# Allegro board CHOPPINGWAVEGENERATOR.brd
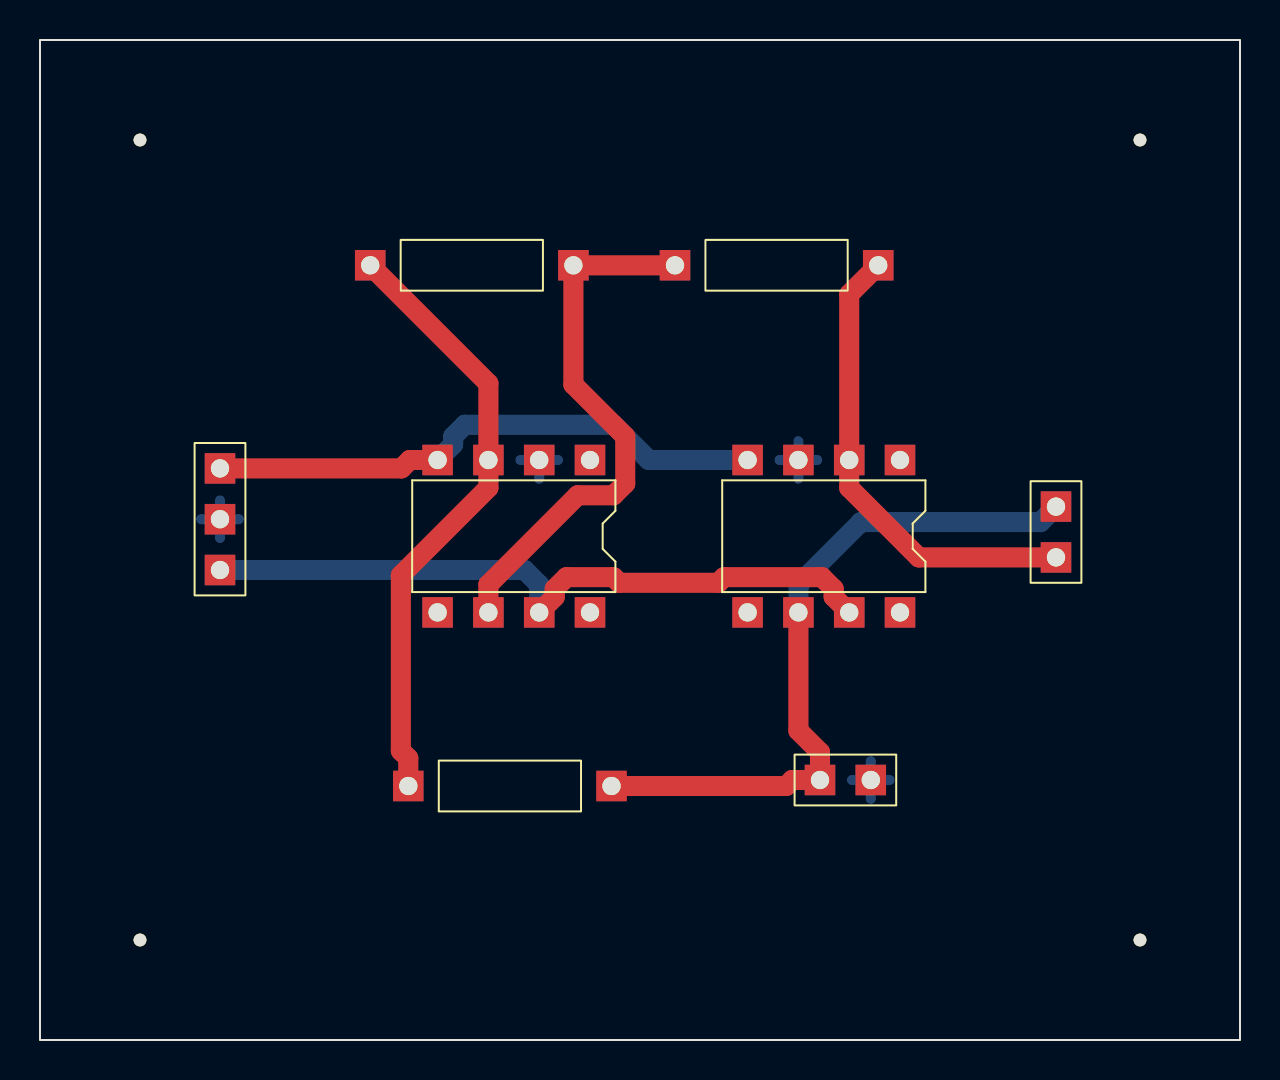
[diagram p0: board, top side]
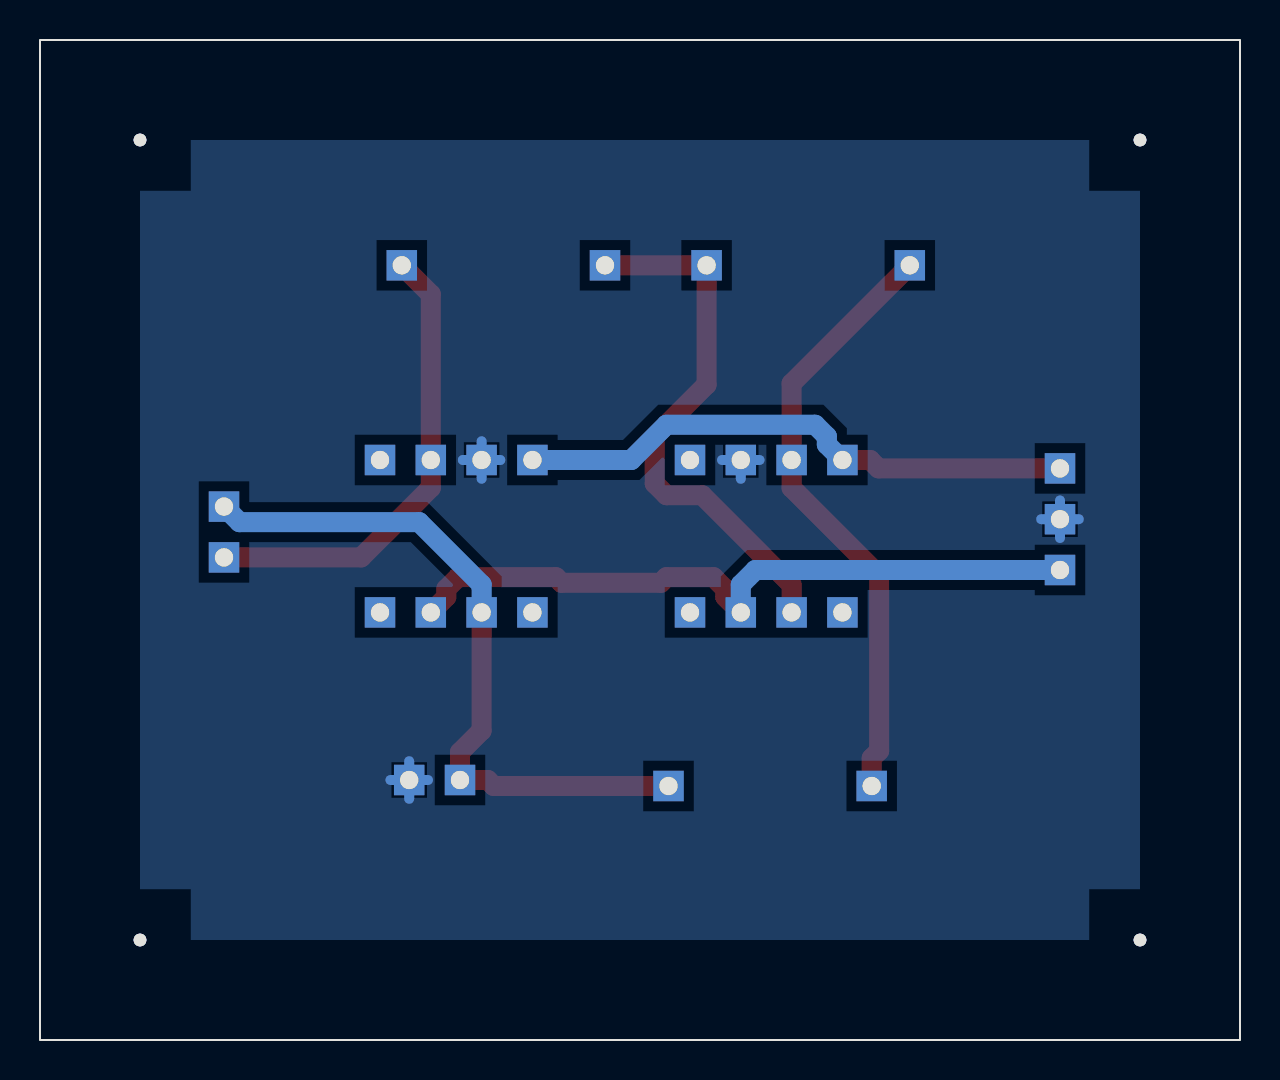
[diagram p1: board, bottom side, seen from below]

Outline 60 x 50 mm; copper layers: TOP, BOTTOM. Coordinates in mm from the lower left corner of the outline.
Outline path: rectangle 0,0 60,50

## Placement (name value [footprint] x y rotation side)
C1  0.01u  [CAPCK05]  50.8 24.13 0 top
J1  CON2  [JUMPER2]  39 13 0 top
J2  CON3  [JUMPER3]  9 23.5 90 top
NOREF  -  [unnamed]  5 45 0 top
NOREF#2  -  [#2]  5 0 90 top
NOREF#3  -  [unnamed]  5 5 0 top
NOREF#4  -  [#2]  0 0 0 top
NOREF#5  -  [unnamed]  55 45 0 top
NOREF#6  -  [#2]  0 0 90 top
NOREF#7  -  [unnamed]  55 5 0 top
NOREF#8  -  [#2]  0 50 0 top
NOREF#9  -  [#2]  55 0 90 top
NOREF#10  -  [#2]  55 5 90 top
NOREF#11  -  [#2]  60 0 90 top
R1  2.7k  [RES400]  31.75 38.73 270 top
R2  20k  [RES400]  16.51 38.73 270 top
R3  10k  [RES400]  28.57 12.7 90 top
U1  LF356  [DIP8_3]  27.5 29 270 top
U2  LF356  [DIP8_3]  43 29 270 top

## Library data of the parts
C1 = CAP NP: Tolerance: ***; User Part Number: ***
J1 = CON2: User Part Number: ***
J2 = CON3_0: User Part Number: ***
R1-R3 = R: Tolerance: ***; User Part Number: ***
U1 U2 = LF356_1: Tolerance: ***; User Part Number: ***

## Footprints (pads in the part's own frame, mm; a bottom-side part is the same pattern mirrored in y, then rotated)
CAPCK05
  rect 1.524x1.524 hole 0.914: 1(0,0) 2(0,2.54)
DIP8_3
  rect 1.524x1.524 hole 0.914: 1(0,0) 2(0,-2.54) 3(0,-5.08) 4(0,-7.62) 5(7.62,-7.62) 6(7.62,-5.08) 7(7.62,-2.54) 8(7.62,0)
JUMPER2
  rect 1.524x1.524 hole 0.914: 1(0,0) 2(2.54,0)
JUMPER3
  rect 1.524x1.524 hole 0.914: 1(0,0) 2(2.54,0) 3(5.08,0)
RES400
  rect 1.524x1.524 hole 0.914: 1(0,0) 2(0,10.16)
unnamed
  round 0.635 hole 3.175 unplated: (0,0)

## Nets
12V: J2.1 U1.7(V+) U2.7(V+)
-12V: J2.3 U1.4(V-) U2.4(V-)
GND: J1.2 J2.2 U1.2(-IN) U2.3(+IN)
N00450: R1.1 R2.2 U1.6(OUT)
N00475: R2.1 R3.2 U1.3(+IN)
N00582: C1.1 R1.2 U2.2(-IN)
N00641: C1.2 J1.1 R3.1 U2.6(OUT)

Pads without a net: U1 1 5 8; U2 1 5 8

## Routing (per net, layer and track width the routed paths; a pad name or vN(x,y) marks a point on that pad's centre or on a via; arc(x,y) is an arc through that point)
12V: length 35.3
  TOP w1: U2.7 39.68,22.16 39.68,22.56 39.1,23.14 34.2,23.14 33.92,22.86 28.96,22.86 28.68,23.14 26.32,23.14 25.74,22.56 25.74,22.16 U1.7
  BOTTOM w1: J2.1 24.23,23.5 24.96,22.77 U1.7
-12V: length 28.2
  TOP w1: U1.4 18.49,29 18.07,28.58 J2.3
  BOTTOM w1: U2.4 30.44,29 28.68,30.76 21.24,30.76 20.66,30.18 20.66,29.78 U1.4
GND: length 14.1
  BOTTOM w0.5: J2.2 9.94,26.04 ; J2.2 9,25.1 ; J2.2 9,26.98 ; J2.2 8.06,26.04 ; 40.6,13 J1.2 ; J1.2 41.54,12.06 ; J1.2 42.48,13 ; J1.2 41.54,13.94 ; 24.96,28.06 U1.2 ; U1.2 25.9,29 ; U1.2 24.02,29 ; U2.3 38.86,29 ; U2.3 36.98,29 ; U2.3 37.92,29.94 ; U2.3 37.92,28.06
N00450: length 27.4
  TOP w1: U1.6 22.42,22.77 26.89,27.24 28.68,27.24 29.26,27.82 29.26,30.18 26.67,32.77 R2.2 R1.1
N00475: length 30.5
  TOP w1: R2.1 22.42,32.83 U1.3 22.42,27.61 18.04,23.23 18.04,14.46 18.41,14.09 R3.2
N00582: length 23.5
  TOP w1: R1.2 40.46,37.28 U2.2 40.46,27.61 43.94,24.13 C1.1
N00641: length 35.3
  TOP w1: R3.1 37.31,12.7 37.61,13 J1.1 39,14.39 37.92,15.47 U2.6
  BOTTOM w1: U2.6 37.92,22.77 41.04,25.89 50.02,25.89 C1.2

## Copper pours and planes (outline as drawn; the poured copper is in the pictures)
GND on BOTTOM: 55,45 55,5 5,5 5,45

## Text on the board
DIMENSION: FIGURE | SIZE | 0.9144 | 3.175 | DRILL CHART: TOP to BOTTOM | ALL UNITS ARE IN MILLIMETERS | PLATED | NON-PLATED | QTY | 29 | 4
